# EAGLE board adafruit permaproto halfbreadboard (EAGLE 5.01)
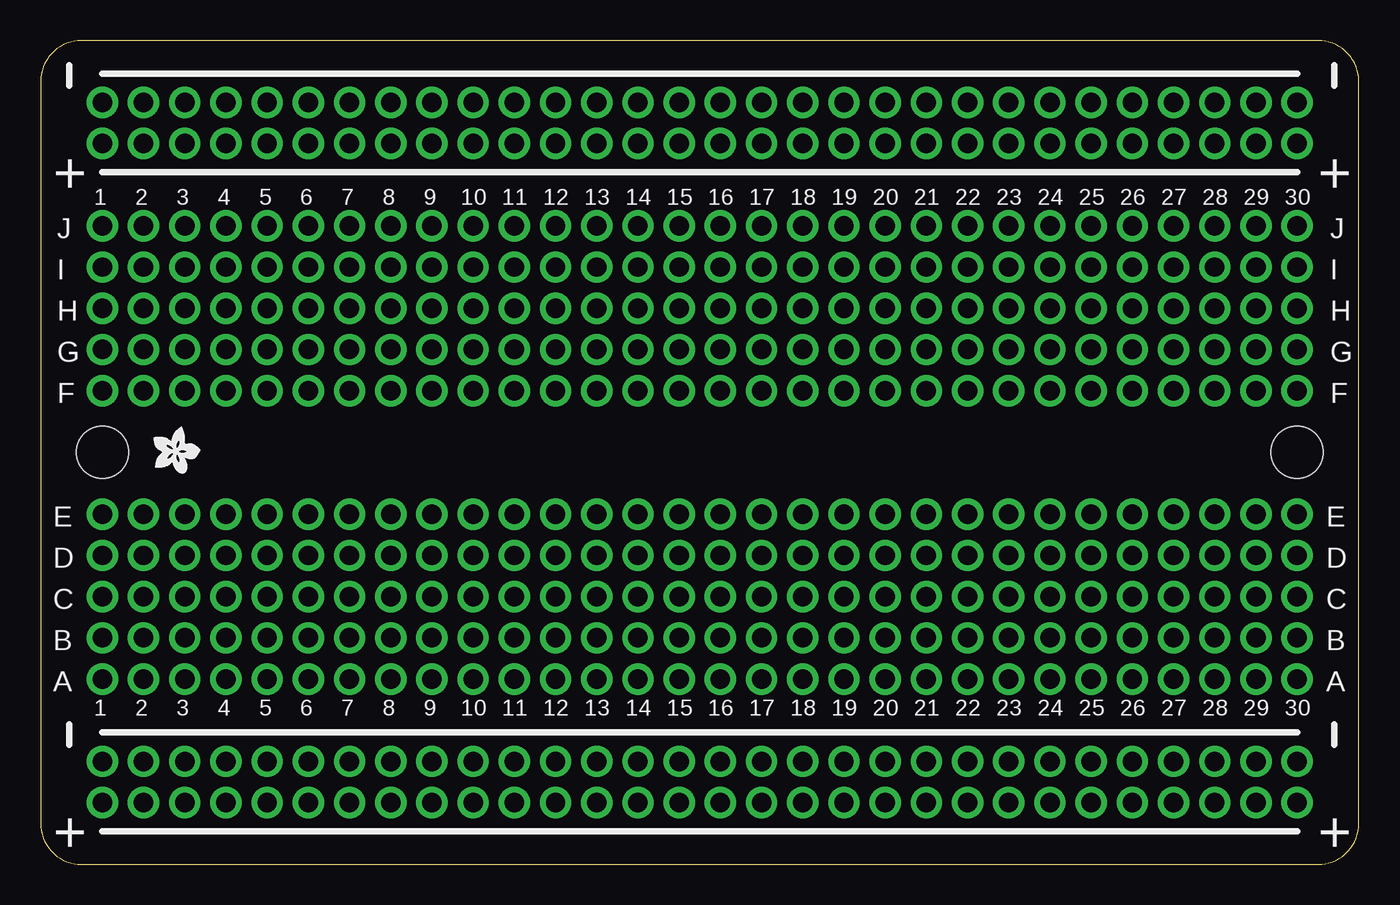
[diagram p0: board, top side]
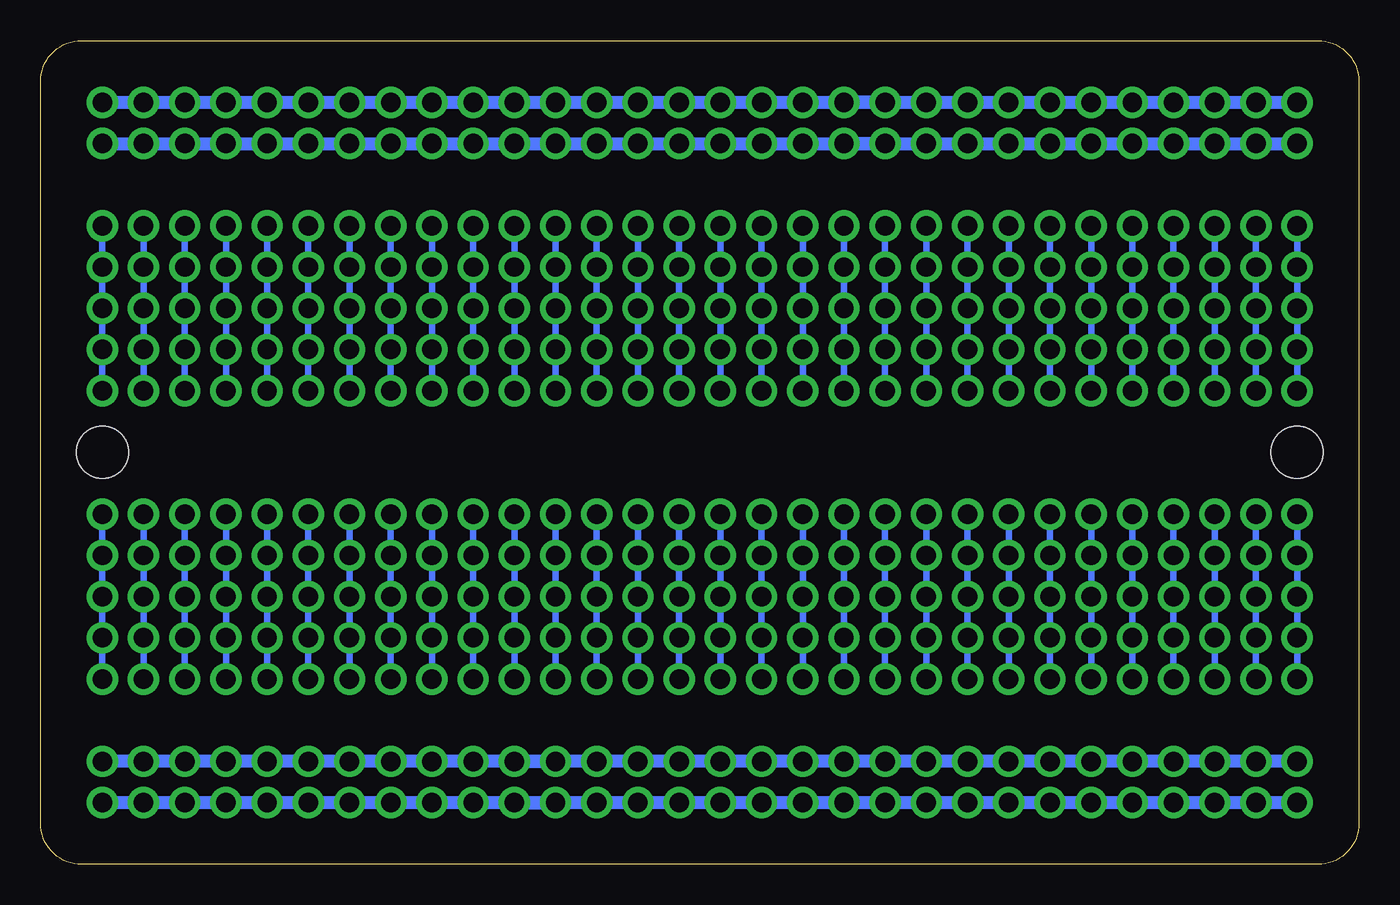
[diagram p1: board, bottom side, seen from below]

Size 81.28 x 50.8 mm. Coordinates in mm from the lower left corner, seen from the top.
Outline: 2.54,50.8 arc90 0,48.26 0,2.54 arc90 2.54,0 78.74,0 arc90 81.28,2.54 81.28,48.26 arc90 78.74,50.8 2.54,50.8
Copper layers (1*16): Top 0.035mm / dielectric 1.5mm / Bottom 0.035mm
Design rules "default": minimum track width 10mil, minimum drill 24mil, track to track 8mil, track to pad 8mil, pad to pad 8mil, via to via 8mil, smd to smd 8mil, copper to edge 40mil, drill to drill 8mil, minimum pad ring 10mil, minimum via ring 8mil, stop-mask expansion 4mil, vias tented up to drill 0mil, thermal gap 10mil
Holes 3.2 mm at 3.81,25.4 77.47,25.4

## Placement (x,y rotation side)
U$1  [ADAFRUIT200MIL]  8.38,25.65 270 top

## Library data of the parts
U$1 = adafruit

## Tracks (layer width: path | path; a pad name or v marks a point on that pad's centre or on a via)
N$1  (via drill 1.2 pad 1.93)
  Bottom 0.406: v3.81,21.59 v3.81,19.05 v3.81,16.51 v3.81,13.97 v3.81,11.43
N$2  (via drill 1.2 pad 1.93)
  Bottom 0.406: v6.35,11.43 v6.35,13.97 v6.35,16.51 v6.35,19.05 v6.35,21.59
N$3  (via drill 1.2 pad 1.93)
  Bottom 0.406: v8.89,21.59 v8.89,19.05 v8.89,16.51 v8.89,13.97 v8.89,11.43
N$4  (via drill 1.2 pad 1.93)
  Bottom 0.406: v11.43,11.43 v11.43,13.97 v11.43,16.51 v11.43,19.05 v11.43,21.59
N$5  (via drill 1.2 pad 1.93)
  Bottom 0.406: v13.97,21.59 v13.97,19.05 v13.97,16.51 v13.97,13.97 v13.97,11.43
N$6  (via drill 1.2 pad 1.93)
  Bottom 0.406: v16.51,11.43 v16.51,13.97 v16.51,16.51 v16.51,19.05 v16.51,21.59
N$7  (via drill 1.2 pad 1.93)
  Bottom 0.406: v21.59,11.43 v21.59,13.97 v21.59,16.51 v21.59,19.05 v21.59,21.59
N$8  (via drill 1.2 pad 1.93)
  Bottom 0.406: v19.05,21.59 v19.05,19.05 v19.05,16.51 v19.05,13.97 v19.05,11.43
N$9  (via drill 1.2 pad 1.93)
  Bottom 0.406: v24.13,21.59 v24.13,19.05 v24.13,16.51 v24.13,13.97 v24.13,11.43
N$10  (via drill 1.2 pad 1.93)
  Bottom 0.406: v26.67,21.59 v26.67,19.05 v26.67,16.51 v26.67,13.97 v26.67,11.43
N$11  (via drill 1.2 pad 1.93)
  Bottom 0.406: v29.21,21.59 v29.21,19.05 v29.21,16.51 v29.21,13.97 v29.21,11.43
N$12  (via drill 1.2 pad 1.93)
  Bottom 0.406: v31.75,11.43 v31.75,13.97 v31.75,16.51 v31.75,19.05 v31.75,21.59
N$13  (via drill 1.2 pad 1.93)
  Bottom 0.406: v34.29,21.59 v34.29,19.05 v34.29,16.51 v34.29,13.97 v34.29,11.43
N$14  (via drill 1.2 pad 1.93)
  Bottom 0.406: v36.83,11.43 v36.83,13.97 v36.83,16.51 v36.83,19.05 v36.83,21.59
N$15  (via drill 1.2 pad 1.93)
  Bottom 0.406: v39.37,11.43 v39.37,13.97 v39.37,16.51 | v39.37,16.51 v39.37,19.05 | v39.37,19.05 v39.37,21.59 | v39.37,16.51 v39.37,19.05
N$16  (via drill 1.2 pad 1.93)
  Bottom 0.406: v41.91,21.59 v41.91,19.05 v41.91,16.51 v41.91,13.97 v41.91,11.43
N$17  (via drill 1.2 pad 1.93)
  Bottom 0.406: v46.99,21.59 v46.99,19.05 v46.99,16.51 v46.99,13.97 v46.99,11.43
N$18  (via drill 1.2 pad 1.93)
  Bottom 0.406: v44.45,11.43 v44.45,13.97 v44.45,16.51 v44.45,19.05 v44.45,21.59
N$19  (via drill 1.2 pad 1.93)
  Bottom 0.406: v49.53,21.59 v49.53,19.05 v49.53,16.51 v49.53,13.97 v49.53,11.43
N$20  (via drill 1.2 pad 1.93)
  Bottom 0.406: v52.07,11.43 v52.07,13.97 v52.07,16.51 v52.07,19.05 v52.07,21.59
N$21  (via drill 1.2 pad 1.93)
  Bottom 0.406: v57.15,11.43 v57.15,13.97 v57.15,16.51 v57.15,19.05 v57.15,21.59
N$22  (via drill 1.2 pad 1.93)
  Bottom 0.406: v54.61,21.59 v54.61,19.05 v54.61,16.51 v54.61,13.97 v54.61,11.43
N$23  (via drill 1.2 pad 1.93)
  Bottom 0.406: v59.69,21.59 v59.69,19.05 v59.69,16.51 v59.69,13.97 v59.69,11.43
N$24  (via drill 1.2 pad 1.93)
  Bottom 0.406: v62.23,11.43 v62.23,13.97 v62.23,16.51 v62.23,19.05 v62.23,21.59
N$25  (via drill 1.2 pad 1.93)
  Bottom 0.406: v64.77,21.59 v64.77,19.05 v64.77,16.51 v64.77,13.97 v64.77,11.43
N$26  (via drill 1.2 pad 1.93)
  Bottom 0.406: v67.31,11.43 v67.31,13.97 v67.31,16.51 v67.31,19.05 v67.31,21.59
N$27  (via drill 1.2 pad 1.93)
  Bottom 0.406: v72.39,21.59 v72.39,19.05 v72.39,16.51 v72.39,13.97 v72.39,11.43
N$28  (via drill 1.2 pad 1.93)
  Bottom 0.406: v69.85,11.43 v69.85,13.97 v69.85,16.51 v69.85,19.05 v69.85,21.59
N$29  (via drill 1.2 pad 1.93)
  Bottom 0.406: v74.93,21.59 v74.93,19.05 v74.93,16.51 v74.93,13.97 v74.93,11.43
N$30  (via drill 1.2 pad 1.93)
  Bottom 0.406: v77.47,11.43 v77.47,13.97 v77.47,16.51 v77.47,19.05 v77.47,21.59
N$31  (via drill 1.2 pad 1.93)
  Bottom 0.813: v3.81,6.35 v6.35,6.35 v8.89,6.35 v11.43,6.35 v13.97,6.35 v16.51,6.35 v19.05,6.35 v21.59,6.35 v24.13,6.35 v26.67,6.35 v29.21,6.35 v31.75,6.35 v34.29,6.35 v36.83,6.35 v39.37,6.35 v41.91,6.35 v44.45,6.35 v46.99,6.35 v49.53,6.35 | v49.53,6.35 v52.07,6.35 | v52.07,6.35 v54.61,6.35 v57.15,6.35 v59.69,6.35 v62.23,6.35 v64.77,6.35 v67.31,6.35 | v67.31,6.35 v69.85,6.35 | v69.85,6.35 v72.39,6.35 v74.93,6.35 v77.47,6.35 | v67.31,6.35 v69.85,6.35 | v52.07,6.35 v49.53,6.35
N$32  (via drill 1.2 pad 1.93)
  Bottom 0.813: v3.81,3.81 v6.35,3.81 v8.89,3.81 v11.43,3.81 v13.97,3.81 v16.51,3.81 v19.05,3.81 v21.59,3.81 v24.13,3.81 v26.67,3.81 v29.21,3.81 v31.75,3.81 v34.29,3.81 v36.83,3.81 v39.37,3.81 v41.91,3.81 v44.45,3.81 v46.99,3.81 v49.53,3.81 | v49.53,3.81 v52.07,3.81 | v52.07,3.81 v54.61,3.81 v57.15,3.81 v59.69,3.81 v62.23,3.81 v64.77,3.81 v67.31,3.81 | v67.31,3.81 v69.85,3.81 | v69.85,3.81 v72.39,3.81 v74.93,3.81 v77.47,3.81 | v67.31,3.81 v69.85,3.81 | v52.07,3.81 v49.53,3.81
N$33  (via drill 1.2 pad 1.93)
  Bottom 0.406: v77.47,29.21 v77.47,31.75 v77.47,34.29 v77.47,36.83 v77.47,39.37
N$34  (via drill 1.2 pad 1.93)
  Bottom 0.406: v74.93,39.37 v74.93,36.83 v74.93,34.29 v74.93,31.75 v74.93,29.21
N$35  (via drill 1.2 pad 1.93)
  Bottom 0.406: v72.39,29.21 v72.39,31.75 v72.39,34.29 v72.39,36.83 v72.39,39.37
N$36  (via drill 1.2 pad 1.93)
  Bottom 0.406: v69.85,39.37 v69.85,36.83 v69.85,34.29 v69.85,31.75 v69.85,29.21
N$37  (via drill 1.2 pad 1.93)
  Bottom 0.406: v67.31,29.21 v67.31,31.75 v67.31,34.29 v67.31,36.83 v67.31,39.37
N$38  (via drill 1.2 pad 1.93)
  Bottom 0.406: v64.77,39.37 v64.77,36.83 v64.77,34.29 v64.77,31.75 v64.77,29.21
N$39  (via drill 1.2 pad 1.93)
  Bottom 0.406: v59.69,39.37 v59.69,36.83 v59.69,34.29 v59.69,31.75 v59.69,29.21
N$40  (via drill 1.2 pad 1.93)
  Bottom 0.406: v62.23,29.21 v62.23,31.75 v62.23,34.29 v62.23,36.83 v62.23,39.37
N$41  (via drill 1.2 pad 1.93)
  Bottom 0.406: v57.15,29.21 v57.15,31.75 v57.15,34.29 v57.15,36.83 v57.15,39.37
N$42  (via drill 1.2 pad 1.93)
  Bottom 0.406: v54.61,29.21 v54.61,31.75 v54.61,34.29 v54.61,36.83 v54.61,39.37
N$43  (via drill 1.2 pad 1.93)
  Bottom 0.406: v52.07,29.21 v52.07,31.75 v52.07,34.29 v52.07,36.83 v52.07,39.37
N$44  (via drill 1.2 pad 1.93)
  Bottom 0.406: v49.53,39.37 v49.53,36.83 v49.53,34.29 v49.53,31.75 v49.53,29.21
N$45  (via drill 1.2 pad 1.93)
  Bottom 0.406: v46.99,29.21 v46.99,31.75 v46.99,34.29 v46.99,36.83 v46.99,39.37
N$46  (via drill 1.2 pad 1.93)
  Bottom 0.406: v44.45,39.37 v44.45,36.83 v44.45,34.29 v44.45,31.75 v44.45,29.21
N$47  (via drill 1.2 pad 1.93)
  Bottom 0.406: v41.91,39.37 v41.91,36.83 v41.91,34.29 | v41.91,34.29 v41.91,31.75 | v41.91,31.75 v41.91,29.21 | v41.91,34.29 v41.91,31.75
N$48  (via drill 1.2 pad 1.93)
  Bottom 0.406: v39.37,29.21 v39.37,31.75 v39.37,34.29 v39.37,36.83 v39.37,39.37
N$49  (via drill 1.2 pad 1.93)
  Bottom 0.406: v34.29,29.21 v34.29,31.75 v34.29,34.29 v34.29,36.83 v34.29,39.37
N$50  (via drill 1.2 pad 1.93)
  Bottom 0.406: v36.83,39.37 v36.83,36.83 v36.83,34.29 v36.83,31.75 v36.83,29.21
N$51  (via drill 1.2 pad 1.93)
  Bottom 0.406: v31.75,29.21 v31.75,31.75 v31.75,34.29 v31.75,36.83 v31.75,39.37
N$52  (via drill 1.2 pad 1.93)
  Bottom 0.406: v29.21,39.37 v29.21,36.83 v29.21,34.29 v29.21,31.75 v29.21,29.21
N$53  (via drill 1.2 pad 1.93)
  Bottom 0.406: v24.13,39.37 v24.13,36.83 v24.13,34.29 v24.13,31.75 v24.13,29.21
N$54  (via drill 1.2 pad 1.93)
  Bottom 0.406: v26.67,29.21 v26.67,31.75 v26.67,34.29 v26.67,36.83 v26.67,39.37
N$55  (via drill 1.2 pad 1.93)
  Bottom 0.406: v21.59,29.21 v21.59,31.75 v21.59,34.29 v21.59,36.83 v21.59,39.37
N$56  (via drill 1.2 pad 1.93)
  Bottom 0.406: v19.05,39.37 v19.05,36.83 v19.05,34.29 v19.05,31.75 v19.05,29.21
N$57  (via drill 1.2 pad 1.93)
  Bottom 0.406: v16.51,29.21 v16.51,31.75 v16.51,34.29 v16.51,36.83 v16.51,39.37
N$58  (via drill 1.2 pad 1.93)
  Bottom 0.406: v13.97,39.37 v13.97,36.83 v13.97,34.29 v13.97,31.75 v13.97,29.21
N$59  (via drill 1.2 pad 1.93)
  Bottom 0.406: v8.89,29.21 v8.89,31.75 v8.89,34.29 v8.89,36.83 v8.89,39.37
N$60  (via drill 1.2 pad 1.93)
  Bottom 0.406: v11.43,39.37 v11.43,36.83 v11.43,34.29 v11.43,31.75 v11.43,29.21
N$61  (via drill 1.2 pad 1.93)
  Bottom 0.406: v6.35,29.21 v6.35,31.75 v6.35,34.29 v6.35,36.83 v6.35,39.37
N$62  (via drill 1.2 pad 1.93)
  Bottom 0.406: v3.81,39.37 v3.81,36.83 v3.81,34.29 v3.81,31.75 v3.81,29.21
N$63  (via drill 1.2 pad 1.93)
  Bottom 0.813: v77.47,44.45 v74.93,44.45 v72.39,44.45 v69.85,44.45 v67.31,44.45 v64.77,44.45 v62.23,44.45 v59.69,44.45 v57.15,44.45 v54.61,44.45 v52.07,44.45 v49.53,44.45 v46.99,44.45 v44.45,44.45 v41.91,44.45 v39.37,44.45 v36.83,44.45 v34.29,44.45 v31.75,44.45 | v31.75,44.45 v29.21,44.45 | v29.21,44.45 v26.67,44.45 v24.13,44.45 v21.59,44.45 v19.05,44.45 v16.51,44.45 v13.97,44.45 | v13.97,44.45 v11.43,44.45 | v11.43,44.45 v8.89,44.45 v6.35,44.45 v3.81,44.45 | v13.97,44.45 v11.43,44.45 | v29.21,44.45 v31.75,44.45
N$64  (via drill 1.2 pad 1.93)
  Bottom 0.813: v77.47,46.99 v74.93,46.99 v72.39,46.99 v69.85,46.99 v67.31,46.99 v64.77,46.99 v62.23,46.99 v59.69,46.99 v57.15,46.99 v54.61,46.99 v52.07,46.99 v49.53,46.99 v46.99,46.99 v44.45,46.99 v41.91,46.99 v39.37,46.99 v36.83,46.99 v34.29,46.99 v31.75,46.99 | v31.75,46.99 v29.21,46.99 | v29.21,46.99 v26.67,46.99 v24.13,46.99 v21.59,46.99 v19.05,46.99 v16.51,46.99 v13.97,46.99 | v13.97,46.99 v11.43,46.99 | v11.43,46.99 v8.89,46.99 v6.35,46.99 v3.81,46.99 | v13.97,46.99 v11.43,46.99 | v29.21,46.99 v31.75,46.99

## Text on the board
tPlace: 1 | 2 | 3 | 4 | 5 | 6 | 7 | 8 | 9 | 10 | 11 | 12 | 13 | 14 | 15 | 16 | 17 | 18 | 19 | 20 | 21 | 22 | 23 | 24 | 25 | 26 | 27 | 28 | 29 | 30 | J | J | I | I | H | H | G | G | F | F | E | E | D | D | C | C | B | B | A | A | 1 | 2 | 3 | 4 | 5 | 6 | 7 | 8 | 9 | 10 | 11 | 12 | 13 | 14 | 15 | 16 | 17 | 18 | 19 | 20 | 21 | 22 | 23 | 24 | 25 | 26 | 27 | 28 | 29 | 30
tDocu: Adafruit Perma-Proto 1/2 Sized Breadboard
tPlaceRed: + | + | + | +